# Altium PCB FU6561N-XCQ-DEMO_V1.0-20251116.pcbdoc
Units mm, origin at the board's own origin, x right, y up, seen from the top; angles counter-clockwise.
Board outline 57.6 x 57.58 mm, 2 copper layers (Top Layer, Bottom Layer); 115 components, 47 nets, 275 pads, 313 vias.
Unrouted connection lines stored in the file: 15.
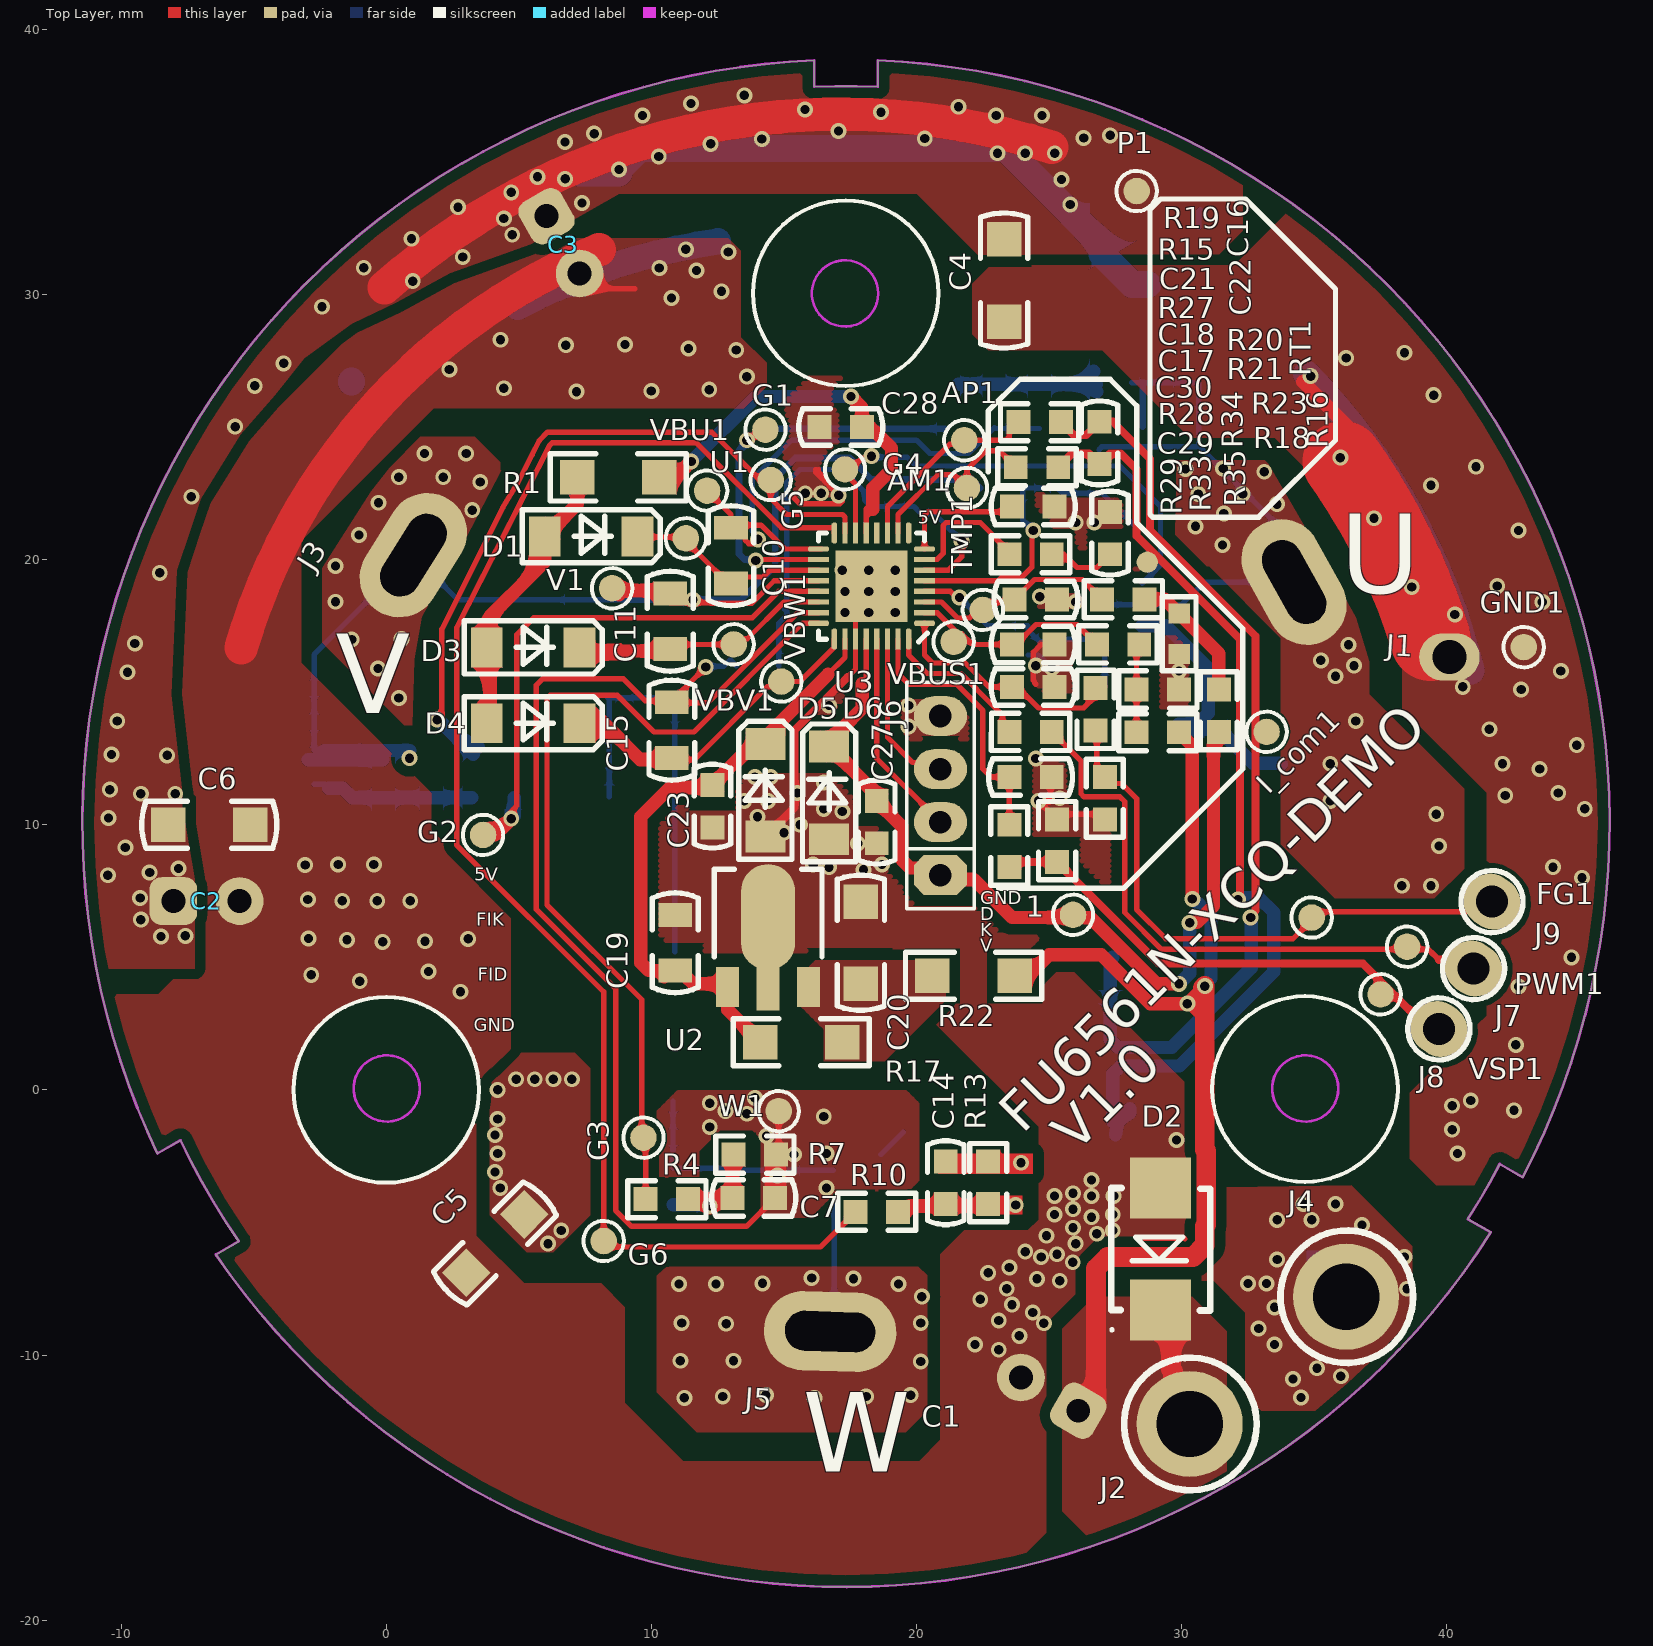
[diagram p0: Top Layer view]
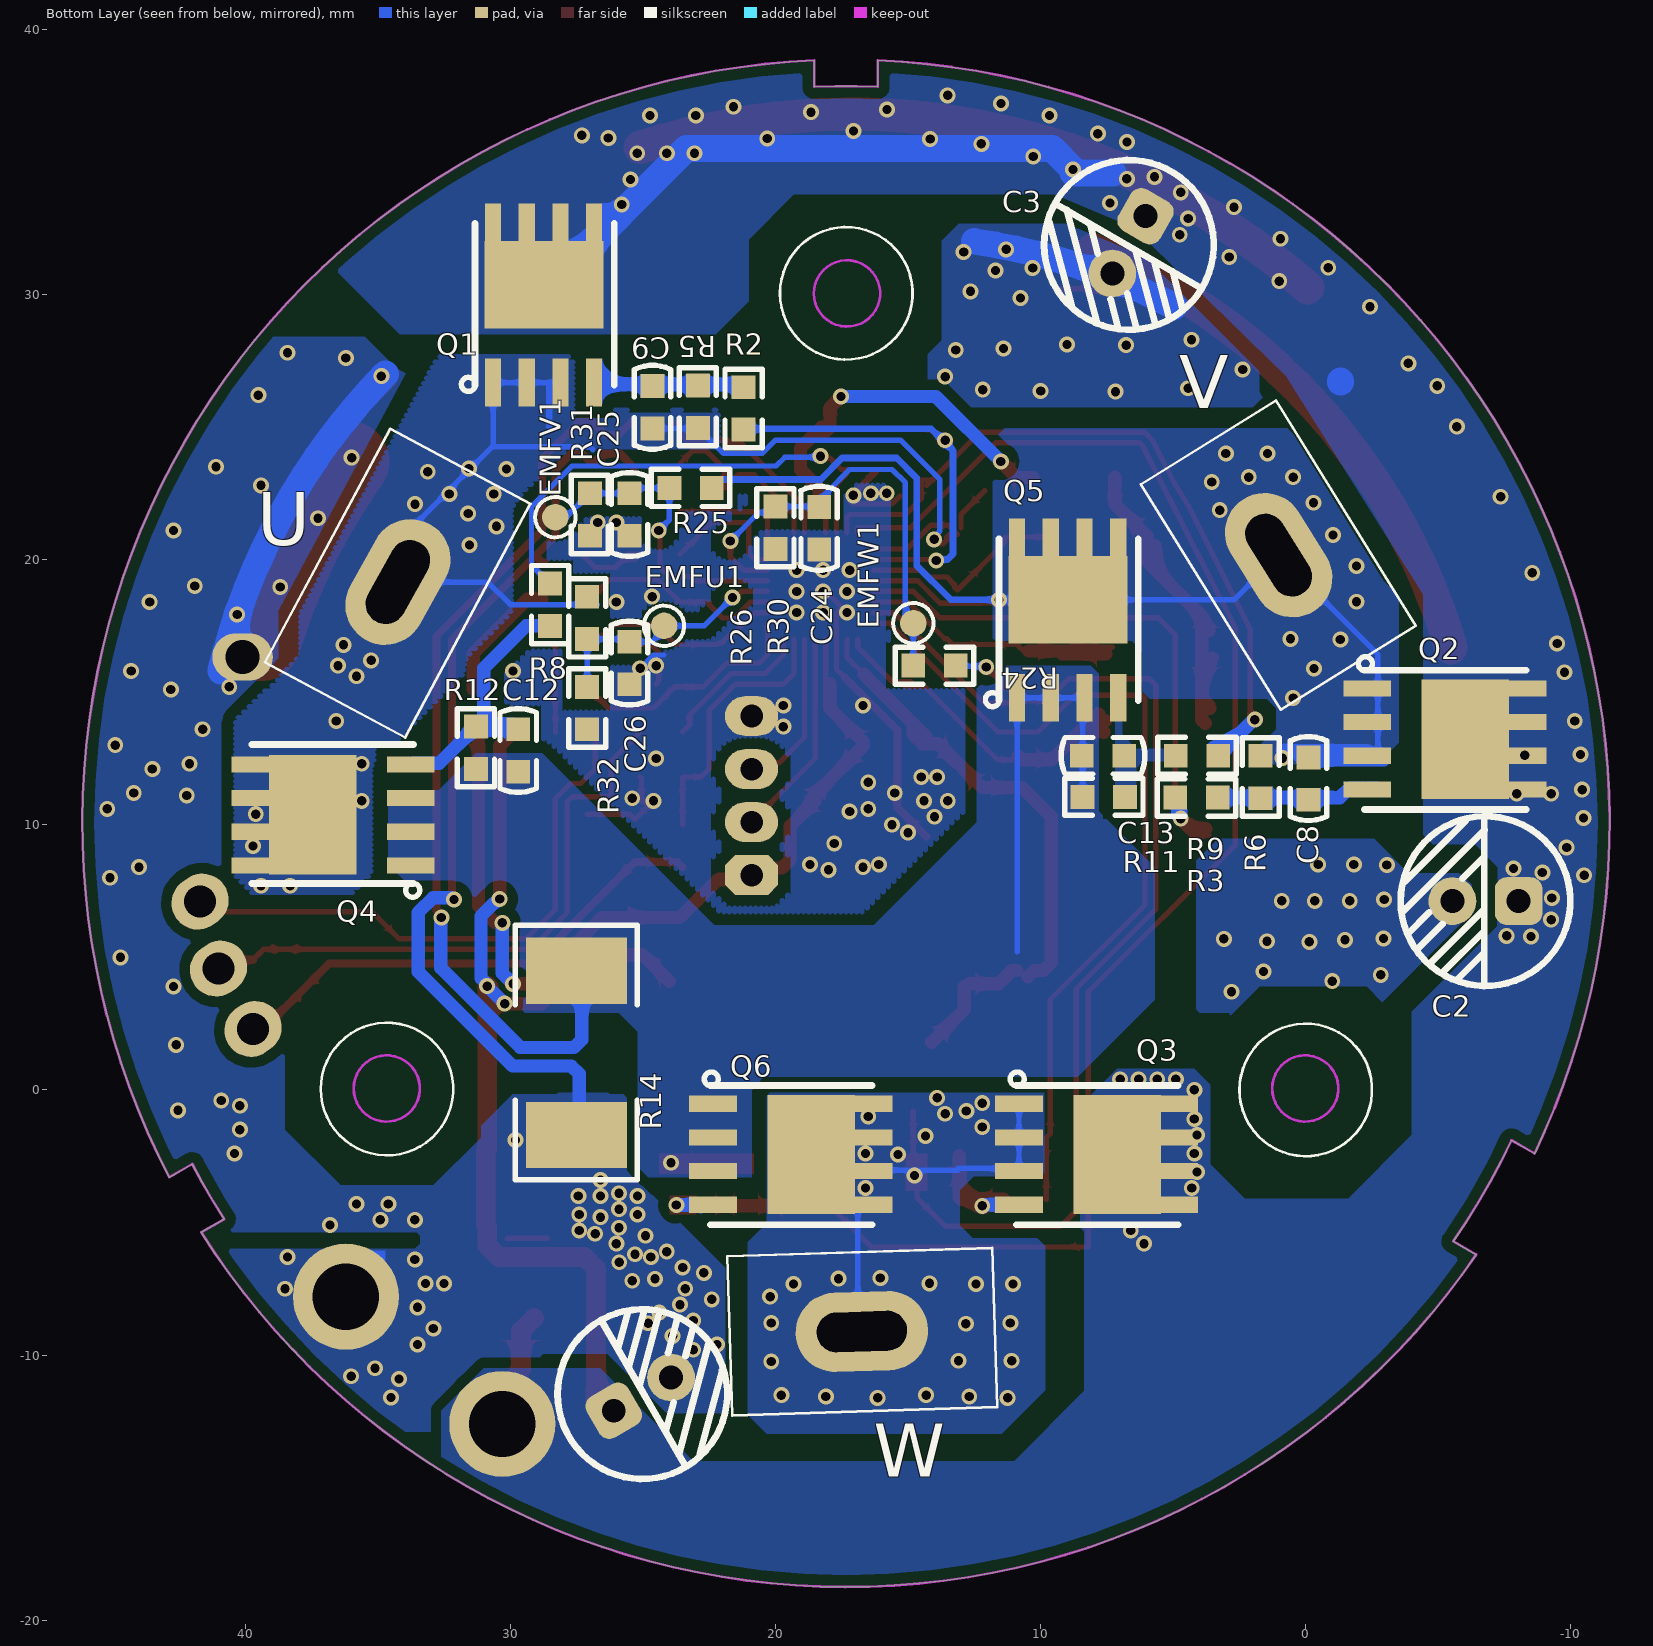
[diagram p1: Bottom Layer view, seen from below]

## Layer stack, top to bottom
Top Layer: signal copper 0.0356
Dielectric: dielectric 0.32, FR-4, Dk 4.8
Bottom Layer: signal copper 0.0356

## Board outline
-6.43,-6.211 -5.562,-5.71 cw(c17.338,10.052) -7.762,-1.899 -8.63,-2.401 cw(c17.338,10.052) 16.138,38.827 16.138,37.826 cw(c17.338,10.052) 18.538,37.826 18.538,38.827 cw(c17.338,10.052) 42.858,-3.296 41.991,-2.796 cw(c17.339,10.051) 40.791,-4.874 41.658,-5.375 cw(c17.338,10.052)

## Design rules (kind name [scope] priority, off if disabled: settings)
Clearance Clearance_1 [All vs InPolygon] p1: gap=0.4
Clearance [All] p2: gap=0.2
ComponentClearance [All] p1 off: gap=0.254 collisioncheckmode=3 verticalgap=0.254 showdistances=FALSE
Height [All] p1 off: minheight=0 maxheight=25.4 prefheight=12.7
HoleSize [All] p1 off: absolutevalues=TRUE maxlimit=2.54 minlimit=0.025 maxpercent=80.000 minpercent=20.000
HoleToHoleClearance [All] p1: gap=0.178 allowstackedmicrovias=TRUE
MinimumSolderMaskSliver [All] p1 off: minsoldermaskwidth=0.102
NetAntennae [All] p1 off: netantennaetolerance=0.025
PolygonConnect [All] p1: connectstyle=Direct reliefconductorwidth=0.254 reliefentries=4 polygonreliefangle="90 Angle"
RoutingVias [All] p1: holewidth=0.3 width=0.6 viastyle="Through Hole" minholewidth=0.2 minwidth=0.5 maxholewidth=0.711 maxwidth=1.27
SilkToSilkClearance [All] p1: silktosilkclearance=0
SilkscreenOverComponentPads [IsPad] p1: minsilkscreentomaskgap=0
SolderMaskExpansion [All] p1: expansion=0.102
Width [All] p1: maxlimit=7.62 minlimit=0.178 preferedwidth=0.2
20 further rules are at their usual default settings.

## Components (designator, comment, footprint, x,y, rotation, side; value= is the part's Value field where it differs from the comment)
1 "" TPM 25.9,6.6 r270 top
AM1 "" TPM 21.9,22.7 r180 top
AP1 "" TPM 21.8,24.5 r180 top
C1 "180uF/35V" CAP2_5 25.068,-11.526 r0 top
C2 "180uF/35V" CAP2_5 -6.851,7.138 r210 top locked
C3 "180uF/35V" CAP2_5 6.649,31.938 r150 top locked
C4 "CT106/50V" c1206 23.3,29 r90 top
C5 "CT106/50V" c1206 3.026,-6.874 r45 top
C6 "CT106/50V" c1206 -5.15,9.996 r180 top
C7 "1nf/50V" c0603 14.619,-4.072 r180 top
C8 "1nf/50V" C0603 -0.1,12.5 r270 bottom
C9 "1nf/50V" C0603 24.637,24.984 r90 bottom
C10 "CT106/25V" c0805 13,21.166 r270 top
C11 "CT106/25V" c0805 10.712,18.692 r270 top
C12 "1nf/50V" c0603 29.699,12.04 r90 bottom
C13 "1nf/50V" C0603 8.405,12.6 r180 bottom
C14 "1nf/50V" C0603 21.099,-2.74 r270 top
C15 "CT106/25V" c0805 10.771,14.585 r270 top
C16 "101/16V" c0603 26.901,23.64 r90 top
C17 "1uf/25V" c0603 23.64,16.799 r0 top
C18 "104/16V" c0603 25.26,18.501 r180 top
C19 "106/25V" C0805 10.9,6.566 r270 top
C20 "105/50V" c1206 17.9,4.026 r90 top
C21 "1uF/25V" C0603 25.16,22.001 r180 top
C22 "1uF/25V" c0603 27.299,21.76 r270 top
C23 "10uF/25V" c0603 12.299,11.46 r270 top
C24 "101/16V" c0603 18.35,21.941 r270 bottom
C25 "101/16V" c0603 25.501,22.46 r270 bottom
C26 "101/16V" c0603 25.499,15.34 r90 bottom
C27 "1uF/25V" C0603 18.499,10.86 r270 top
C28 "10uF/25V" C0603 17.9,25 r180 top
C29 "101/16V" c0603 25.06,11.801 r180 top
C30 "104/16V" c0603 25.16,15.201 r180 top
D1 "LL4148" SOD-123#1 5.952,20.875 r0 top
D2 "TVS_43V" "DO214AA, SMB" 29.2,-6 r90 top
D3 "LL4148" SOD-123#1 3.762,16.686 r0 top
D4 "LL4148" SOD-123#1 3.763,13.829 r0 top
D5 "SMF24CA" SOD-123#2 14.3,11.3 r90 top
D6 "BZT52C5V6" SOD-123#2 16.7,11.2 r90 top
EMFU1 "" TPM 24.2,17.5 r0 bottom
EMFV1 "" TPM 28.3,21.6 r0 bottom
EMFW1 "" TPM 14.8,17.6 r0 bottom
FG1 "" TPM 38.5,5.4 r0 top
G1 "" TPM 14.3,24.9 r0 top
G2 "" TPM 3.649,9.614 r0 top
G3 "" TPM 9.7,-1.8 r0 top
G4 "" TPM 17.3,23.4 r0 top
G5 "" TPM 14.5,23 r0 top
G6 "" TPM 8.2,-5.7 r0 top
GND1 "" TPM 42.9,16.7 r90 top
I_com1 "" TPM 33.2,13.5 r90 top
J1 "U" AD#1 34.238,19.152 r87 top locked
J2 "BAT+" DY 30.3,-12.6 r0 top
J3 "V" AD#2 1.023,20.167 r58 top
J4 "BAT-" DY 36.2,-7.8 r0 top
J5 "W" AD#3 16.738,-9.114 r356 top
J6 "JTAG" SIP4-2 20.9,11.1 r90 top locked
J7 "FG" tp 41.003,4.575 r0 top
J8 "PWM" tp 39.7,2.3 r0 top
J9 "VSP" tp 41.7,7.1 r0 top
P1 "" TPM 28.3,33.9 r0 top
PWM1 "" TPM 37.5,3.6 r90 top
Q1 "MXP4004SG" PQFQ5X6 28.81,30.327 r90 bottom
Q2 "MXP4004SG" PQFQ5X6 -5.972,13.302 r180 bottom
Q3 "MXP4004SG" PQFQ5X6 7.163,-2.36 r180 bottom
Q4 "MXP4004SG" PQFQ5X6 37.4,10.3 r0 bottom
Q5 "MXP4004SG" PQFQ5X6 9.046,18.436 r90 bottom
Q6 "MXP4004SG" PQFQ5X6 18.701,-2.36 r180 bottom locked
R1 "10-1%" r1206 7.2,23.1 r0 top
R2 "68R-1%" r0603#1 21.19,24.895 r90 bottom
R3 "68R-1%" r0603#1 4.925,11.016 r180 bottom
R4 "68R-1%" r0603#1 9.776,-4.131 r0 top
R5 "10K-1%" r0603#1 22.916,24.96 r90 bottom
R6 "10K-1%" r0603#1 1.71,12.605 r270 bottom
R7 "10K-1%" r0603#1 14.707,-2.428 r180 top
R8 "68R-1%" r0603#1 28.51,19.105 r270 bottom
R9 "68R-1%" r0603#1 3.295,12.61 r0 bottom
R10 "68R-1%" r0603#1 17.695,-4.61 r0 top
R11 "10K-1%" r0603#1 8.419,11.041 r180 bottom
R12 "10K-1%" r0603#1 31.286,12.099 r90 bottom
R13 "10K-1%" r0603#1 22.69,-2.695 r270 top
R14 "1mR/3W-1%" r2512 27.5,-1.7 r90 bottom
R15 "1K-1%" r0603#1 23.736,23.473 r0 top
R16 "10K-1%" r0603#1 31.41,13.495 r90 top
R17 "NC/0R 1%" R1206 14.1,1.8 r0 top
R18 "30K-1%" r0603#1 29.9,13.5 r180 top
R19 "1K-1%" r0603#1 23.836,25.173 r0 top
R20 "1K-1%" r0603#1 28.605,18.51 r180 top
R21 "1K-1%" r0603#1 28.405,16.81 r180 top
R22 "22R 1%" R1206 23.7,4.3 r180 top
R23 "5.1K-1%" r0603#1 28.295,15.09 r0 top
R24 "18K-1%" r0603#1 13.195,16.01 r0 bottom
R25 "18K-1%" r0603#1 22.395,22.71 r0 bottom
R26 "18K-1%" r0603#1 27.11,18.605 r270 bottom
R27 "33R" r0603#1 23.495,20.19 r0 top
R28 "1K-1%" r0603#1 25.105,13.51 r180 top
R29 "1K-1%" r0603#1 23.51,8.395 r90 top
R30 "3K-1%" r0603#1 19.99,20.395 r90 bottom
R31 "3K-1%" r0603#1 26.99,20.895 r90 bottom
R32 "3K-1%" r0603#1 27.11,15.205 r270 bottom
R33 "10K-1%" r0603#1 25.29,10.205 r270 top
R34 "1K-1%" r0603#1 26.76,13.545 r90 top
R35 "10K-1%" r0603#1 27.11,10.195 r90 top
RT1 "47K-1%" r0603#2 29.9,17.2 r270 top
TMP1 "" TPM 22.5,18.1 r270 top
U1 "" TPM 12.1,22.6 r0 top
U2 "78L15" SOT-89 12.876,3.885 r0 top
U3 "FU6561N" QFN32-0.4-4X4 18.301,19 r180 top
V1 "" TPM 8.519,18.917 r0 top
VBU1 "" TPM 11.3,20.8 r270 top
VBUS1 "" TPM 21.4,16.9 r270 top
VBV1 "" TPM 13.1,16.8 r270 top
VBW1 "" TPM 14.9,15.4 r270 top
VSP1 "" TPM 34.9,6.5 r90 top
W1 "" TPM 14.8,-0.8 r0 top

## Footprints (in the part's own frame and the unit in brackets; to place one, negate y for a bottom-side part, rotate by r counter-clockwise, add the part's x,y. Pads: shape width x height; smd on the part's side, far side on the other; paste and mask are expansions set on the pad)
AD#1 [mm]
  oval 5x3 hole 1.5 slot 3.4 at 32 deg rot 32: 1(0,0)
AD#2 [mm]
  oval 5x3 hole 1.5 slot 3.4 at 0 deg: 1(0,0)
AD#3 [mm]
  oval 5x3 hole 1.5 slot 3.4 at 2 deg rot 2: 1(0,0)
c0603 [mm]
  rect 0.9x0.9 smd: 1(-0.04,0.001) 2(1.56,0.001)
  silkscreen extent -0.82,-0.69 2.34,0.69
C0603 [mm]
  rect 0.9x0.9 smd: 1(-0.04,0.001) 2(1.56,0.001)
  silkscreen extent -0.82,-0.69 2.34,0.69
c0805 [mm]
  rect 0.9x1.27 smd: 1(-0.034,0) 2(2.066,0)
  silkscreen extent -0.87,-0.86 2.9,0.86
C0805 [mm]
  rect 0.9x1.27 smd: 1(-0.034,0) 2(2.066,0)
  silkscreen extent -0.87,-0.86 2.9,0.86
c1206 [mm]
  rect 1.3x1.3 smd: 1(-0.026,0) 2(3.074,0)
  silkscreen extent -1.02,-0.89 4.07,0.89
CAP2_5 [mm]
  rrect50% 1.8x1.8 hole 0.9 rot 150: 1(1.032,-0.574)
  round 1.8 hole 0.9: 2(-1.133,0.676)
  body extent -3.28,-3.14 3.12,3.25, height 14
"DO214AA, SMB" [mm]
  rect 2.3x2.3 smd: 1(-2.3,0) 2(2.3,0)
  silkscreen extent -3.1,-1.87 2.3,1.88, body extent -2.64,-1.87 2.57,1.96, height 2.6
DY [mm]
  round 4 hole 2.5: 1(0,0)
  silkscreen extent -2.47,-2.5 2.52,2.5
PQFQ5X6 [mm]
  rect 1.8x0.61 smd: 1(-3.651,1.837) 2(-3.651,0.567) 3(-3.651,-0.703) 4(-3.651,-1.973) 5(2.207,-1.973) 6(2.207,-0.703) 7(2.207,0.567) 8(2.207,1.837)
  rect 3.3x4.5 smd: 5(0.047,-0.079)
  silkscreen extent -3.98,-2.73 2.35,3.03, body extent -4.04,-2.72 2.59,2.49, height 1
QFN32-0.4-4X4 [mm]
  oct 0.8x0.2 smd: 1(-2,1.4) 8(-2,-1.4) 17(2,-1.4) 24(2,1.4)
  rect 0.8x0.2 smd: 2(-2,1) 3(-2,0.6) 4(-2,0.2) 5(-2,-0.2) 6(-2,-0.6) 7(-2,-1) 18(2,-1) 19(2,-0.6) 20(2,-0.2) 21(2,0.2) 22(2,0.6) 23(2,1)
  oct 0.2x0.8 smd: 9(-1.399,-2) 16(1.401,-2) 25(1.401,2) 32(-1.399,2)
  rect 0.2x0.8 smd: 10(-0.999,-2) 11(-0.599,-2) 12(-0.199,-2) 13(0.201,-2) 14(0.601,-2) 15(1.001,-2) 26(1.001,2) 27(0.601,2) 28(0.201,2) 29(-0.199,2) 30(-0.599,2) 31(-0.999,2)
  rect 2.7x2.7 smd: 27(0.001,0)
  silkscreen extent -2.1,-2 2,2.1, body extent -2.03,-2.16 2.16,2.16, height 1
r0603#1 [mm]
  rect 0.9x0.9 smd: 1(0.005,0.01) 2(1.605,0.01)
  silkscreen extent -0.67,-0.69 2.28,0.71
r0603#2 [mm]
  rect 0.762x0.813 smd: 1(-0.762,0) 2(0.762,0)
  silkscreen extent -1.4,-0.64 1.4,0.64, body extent -0.76,-0.41 0.84,0.39, height 0.45
r1206 [mm]
  rect 1.3x1.3 smd: 1(0,0) 2(3.1,0)
  silkscreen extent -1.02,-0.89 4.12,0.89
R1206 [mm]
  rect 1.3x1.3 smd: 1(0,0) 2(3.1,0)
  silkscreen extent -1.02,-0.89 4.12,0.89
r2512 [mm]
  rect 2.5x3.8 smd: 1(0,0) 2(6.196,0)
  silkscreen extent -1.69,-2.29 7.91,2.31
SIP4-2 [mm]
  oct 1.5x2 hole 0.85: 1(-3,0)
  oval 1.5x2 hole 0.85: 2(-1,0) 3(1,0) 4(3,0)
  silkscreen extent -4.27,-1.27 4.27,1.27
SOD-123#1 [mm]
  rect 1.2x1.5 smd: 1(0.028,0) 2(3.528,0)
  silkscreen extent -0.82,-1 4.38,1
SOD-123#2 [mm]
  rect 1.2x1.5 smd: 1(-1.75,0) 2(1.75,0)
  silkscreen extent -2.6,-1 2.6,1, body extent -1.85,-0.84 1.85,0.76, height 1.2
SOT-89 [mm]
  rect 0.864x1.5 smd: 1(0,0) 3(3.048,0)
  rect 0.864x2 smd: 2(1.524,0.115)
  oval 2.032x4 smd: 2(1.524,2.63)
  silkscreen extent -0.51,1.13 3.56,4.43
tp [mm]
  oval 2x2.2 hole 1.2 rot 55: 1(0,0)
  silkscreen extent -1.17,-1.17 1.17,1.17
TPM [mm]
  round 1 smd: 1(0,0)
  silkscreen extent -0.76,-0.76 0.76,0.76

## Part data
1 AM1 AP1 EMFU1 EMFV1 EMFW1 FG1 G1 G2 G3 G4 G5 G6 GND1 I_com1 P1 PWM1 TMP1 U1 V1 VBU1 VBUS1 VBV1 VBW1 VSP1 W1: library part Component_1
C1 C2 C3: library part CAPACITOR, "Capacitor"
C4 C5 C6 C7 C8 C9 C12 C13 C14: library part Cap, "YG-C1206K106-50V（10UF）-10%"
C10 C11 C15: library part CAP-CC(SMD), "Capacitor"
C16 C17 C20 C21 C22 C23 C24 C25 C26 C27 C28 C29 C30: library part CAP, "Capacitor"
C18: library part "CAP NP"
C19: library part "Cap Semi", "Capacitor (Semiconductor SIM Model)"
D1 D3 D4: library part DIODE, "Diode"
D2: library part D1206
D5 D6: library part TVS1, "Zener Diode"
J1 J2 J3 J4 J5: library part ANTENNA, "Generic Antenna"
J6: library part CON4, "Connector"
J7 J8 J9: library part CON1, "Connector"
Q1 Q2 Q3 Q4 Q5 Q6: library part MOSFET-N
R1 R15 R19 R24 R25 R26 R27 R30 R31 R32: library part RES(SMD)
R2 R3 R4 R8 R9 R10 R20 R21 R28 R29 R33 R34 R35: library part "Res Semi", "Semiconductor Resistor"
R5 R6 R7 R11 R12 R13: library part "Res Semi", "YG-R0603F2002(20KΩ)-1%"
R14: library part R-RES/2
R16: library part RES3
R17 R22: library part res1, "R0603F1001(1KΩ)-1%"
R18 R23: library part res1, "Resistor"
RT1: library part "Res Thermal", "Thermistor"
U2: library part VOLTREG, "78M12"

## Free pads (board coordinates)
  oval 2.286x1.778 hole 1.27: 0(40.097,16.326)
  round 0.8 smd: 1(28.7,19.9)

## Via types
v1: diameter 0.6, hole 0.35, Top Layer to Bottom Layer, tented both sides, 313 vias

## Nets (pads, with @x,y where several pads share a name; then routed paths per layer and width w, separated by ;. In a path a pad name is that pad's centre, name@x,y a point inside that pad or via, vN(x,y) a via of type N, cw(c..) or ccw(c..) an arc to the next point about the centre after c; other vN are vias at no path point)
+12V: C28.1 R1.2 U3.13 | length 16.6
  Top Layer w0.2: U3.13 18.1,21.6 ; 18.35,21.9 18.1,21.9 ; 18.4,21.9 18.1,21.6 ; 18.4,22.3 18.4,22.2 18.35,22.15 18.1,21.9 ; 18.1,21.6 18.1,21.9
  Top Layer w0.5: R1.2 10.9,23.1 v1(11.5,23.7) ; v1(17.527,26.15) 17.94,25.736 C28.1 ; 18.35,21.9 18.35,22.15 18.35,22.689 19.05,23.389 19.05,24.211 18.461,24.799 ; C28.1 18.14,24.799 18.461,24.799 ; C28.1 18.261,24.999 18.461,24.799
  Bottom Layer w0.5: v1(11.5,23.7) 13.95,26.15 v1(17.527,26.15)
AMP0M: AM1.1 R15.1 U3.10 | length 7.2
  Top Layer w0.2: U3.10 19.3,21.7 20.8,23.2 21.4,23.2 AM1.1 21.9,23.4 22.6,24.1 23.124,24.1 R15.1
AMP0O: U3.9
AMP0P: AP1.1 R19.1 U3.11 | length 7.4
  Top Layer w0.2: U3.11 18.9,22 21.247,24.347 21.647,24.347 AP1.1 23.374,24.5 23.491,24.617 23.491,24.833 R19.1
EMFU: C26.2 EMFU1.1 R26.2 R32.1 U3.4 | length 9.5
  Top Layer w0.2: U3.4 21.281,18.8 21.51,18.571 v1(21.618,18.571)
  Bottom Layer w0.2: v1(21.618,18.571) 22.689,17.5 EMFU1.1 24.2,17.347 24.647,16.9 C26.2 25.6,17 R26.2 R32.1
EMFV: C25.1 EMFV1.1 R25.2 R31.2 U3.5 | length 12.3
  Top Layer w0.2: U3.5 23.076,19.2 23.234,19.359 23.993,19.359 24.35,19.716 24.35,21.05 v1(24.4,21.1)
  Bottom Layer w0.2: v1@24.323,21.023 v1(24.4,21.1) ; v1@24.477,21.177 v1(24.4,21.1) ; C25.1 25.3,22.7 R25.2 24,21.5 v1(24.4,21.1) ; C25.1@25.6,22.5 R31.2 EMFV1.1@28.2,21.3
EMFW: C24.1 EMFW1.1 R24.2 R30.2 U3.6 | length 18.1
  Top Layer w0.2: U3.6 21.2,19.6 21.7,20.1 v1(21.7,20.7)
  Bottom Layer w0.2: R24.2 EMFW1.1 15.1,17.9 15.1,22.9 15.6,23.4 17.2,23.4 18.042,22.558 ; C24.1 18.349,22.251 18.042,22.558 ; v1(21.7,20.7) 20.633,21.767 20.133,21.767 19.9,22 18.409,22 18.349,21.94 18.042,22.247 18.042,22.558
FG: R28.2 U3.32 | length 5.8
  Top Layer w0.2: U3.32 19.7,16.4 20.4,15.7 21.669,15.7 22.9,14.469 23.236,14.133 23.236,13.764 R28.2
FICED: J6.3 U3.30 | length 6.2
  Top Layer w0.2: U3.30 18.9,13.3 19.851,12.349 20.651,12.349 J6.3
FICEK: J6.2 U3.29 | length 7.9
  Top Layer w0.2: U3.29 18.5,16.641 18.5,15.553 18.5,14.172 18.5,12.5 J6.2
GND: C1.2 C2.2 C3.2 C4.1 C5.1 C6.1 C16.1 C17.2 C18.1 C19.1 C20.2 C21.1 C22.1 C23.2 C24.2 C25.2 C26.1 C27.2 C28.2 C29.1 C30.1 D2.2 D5.1 D6.1 GND1.1 J4.1 J6.4 pad.0 pad.1 R14.1 R15.2 R23.2 R30.1 R31.1 R32.2 R33.1 R35.1 RT1.2 U2.2 U3.27 | length 119.5
  Top Layer w0.2: 15.3,22.4 15.6,22.1 17.1,22.1 17.2,22.2 17.2,22.285 v1(17.061,22.424) ; 16.2,23.3 16.2,23.285 16.3,23.185 ; 16.2,23.4 16.3,23.3 ; 16.3,23.4 16.3,23.3 ; 16.584,22.984 17.061,22.507 v1(17.061,22.424) ; v1(17.3,18) 17.45,18.15 U3.27@17.55,18.15 ; 17.4,15.565 17.7,15.865 17.7,17 17.7,18 U3.27@17.55,18.15 ; U3.27@18.3,19 17.55,18.25 U3.27@17.55,18.15 ; 24.5,15.3 24.45,15.35 24.45,15.396 24.4,15.445 24.4,16.5 24.7,16.8 C17.2 ; v1@24.7,10.8 24.753,10.853 25.01,10.853 25.049,10.892 25.049,11.749 C29.1 ; v1(25.4,11) 25.323,10.923 25.072,10.923 25.049,10.9 v1(24.6,10.9) R33.1 25.5,10.4 R35.1@27.1,10.4 ; 28.6,-5.6 30.1,-5.6 30.125,-5.625 ; 16.3,23.185 16.5,22.985 ; 16.3,23.185 16.3,23.3 ; 16.3,23.3 16.5,23.1 16.5,22.985 ; 16.5,22.985 v1(17.061,22.424)
  Top Layer w0.203: C3.2@6.631,30.619 7.035,30.215 9.382,30.215
  Top Layer w0.3: D5.1 15.4,10.65 15.4,12.8 15.4,13.565 17.4,15.565 ; R15.2 25.859,24 26.5,24 C16.1 27.3,24 27.7,24 28.3,23.4 28.3,20.893 29.046,20.146 ; pad.1 28.8,19.9 29.046,20.146 ; v1(32.124,7.18) 32.182,7.237 32.182,7.413 32.2,7.431 32.2,16.993 29.046,20.146
  Top Layer w0.508: 34.56,26.714 36.388,24.886
  Top Layer w1.27: -5.474,16.673 cw(c16.913,10.122) 8.021,31.686
  Top Layer w3.048: v1@36.071,23.694 cw(c17.338,10.281) pad.0@39.395,16.94
  Bottom Layer w0.2: 24.2,16.4 24.6,16.4 v1(25.1,15.9) ; v1(24.5,16) 24.9,16 v1@25.1,15.8
  Bottom Layer w0.5: R14.1 R14.1@27.587,-1.196 ; v1(32.124,7.18) 32.151,7.18 32.221,7.25 32.911,7.25 33.467,6.693 33.467,4.456 29.911,0.9 27.693,0.9 27.4,0.607 27.4,-1.196 R14.1@27.587,-1.196 ; R14.1@27.587,-1.196 27.716,-1.104 28.05,-0.869 28.05,-0.7 R14.1@27.587,-1.196
  Bottom Layer w1: 4.963,29.542 cw(c15.858,8.918) 12.5,32
  Bottom Layer w1.016: v1@34.706,27.003 cw(c17.338,10.052) pad.0@40.919,15.791
  other v1: 34.5,-11.6 34.2,-10.9 36,-10.8 35.1,-10.5 23.1,-9.8 22.2,-9.6 33.5,-9.6 23.875,-9.277 32.9,-9 24.8,-8.8 23.1,-8.7 24.382,-8.395 33.5,-8.2 23.6,-8.1 22.4,-7.9 23.4,-7.5 38.5,-7.5 32.5,-7.3 33.2,-7.3 25.4,-7.2 24.54,-7.127 22.7,-6.9 23.5,-6.7 25.89,-6.5 33.6,-6.4 24.7,-6.3 38.4,-6.3 25.3,-6.2 24.1,-6.1 26,-5.8 24.9,-5.5 26.8,-5.425 27.4,-5.3 25.9,-5.2 36.8,-5.1 33.6,-4.9 34.9,-4.9 26.6,-4.8 25.2,-4.7 27.4,-4.7 25.9,-4.5 34.6,-4.3 35.8,-4.3 25.2,-4 26.6,-4 27.433,-4 25.9,-3.9 26.6,-3.4 40.4,-2.4 29.807,-1.893 40.2,-1.5 42.535,-0.771 40.2,-0.6 40.9,-0.4 42.6,1.7 2.8,3.7 42.7,3.9 -1,4.1 -2.829,4.337 1.59,4.464 44.7,5 -0.137,5.582 1.463,5.607 -1.483,5.658 3.089,5.696 -2.931,5.709 -1.661,7.131 -0.34,7.131 0.905,7.131 -2.956,7.182 45.1,8 18,8.3 16.7,8.4 44,8.4 -3.058,8.477 -1.813,8.503 -0.467,8.503 16.1,8.5 18.7,8.5 17.782,9.292 15,9.7 15.6,10 14,10.3 17.2,10.5 16.5,10.6 45.2,10.6 13.5,10.9 14.4,10.9 42.2,11.1 15.5,11.2 44.2,11.2 16.5,11.6 13.9,11.8 14.5,11.8 43.5,12.1 42.1,12.3 24.5,12.5 44.9,13 41.6,13.6 19.7,13.7 16.7,14.5 19.7,14.5 42.8,15.1 40.6,15.2 29.9,15.8 44.3,15.8 40.3,17.926 18.2,18 19.2,18 26,18.4 43.6,18.4 24.65,18.6 17.3,18.8 18.2,18.8 19.2,18.8 38.674,18.967 41.9,19 17.201,19.6 18.2,19.6 19.2,19.6 42.7,21.1 26,21.4 26.7,21.4 37.252,21.558 15.8,22.5 16.4,22.5 39.4,22.8 41.1,23.5 35.982,23.844 39.5,26.2 7.178,26.333 9.998,26.359 12.182,26.41 4.435,26.46 13.6,26.9 34.864,26.918 2.378,27.172 36.2,27.6 38.4,27.8 13.198,27.908 11.395,27.959 6.772,28.086 9.007,28.111 4.308,28.289 10.76,29.864 12.639,30.118 11.7,30.9 10.3,31 12.9,31.6 11.3,31.7
HOU: G1.1 R2.1 U3.18 | length 16.1
  Top Layer w0.2: v1(13.6,24.5) 13.708,24.5 14.108,24.9 G1.1 ; v1(13.934,19.966) 13.968,20 U3.18
  Bottom Layer w0.254: v1(13.934,19.966) 13.9,20 13.513,20 13.3,20.213 13.3,24.106 13.6,24.406 v1(13.6,24.5) 13.694,24.5 14.124,24.93 21.057,24.93 R2.1@21.087,24.9
HOV: G2.1 R3.1 U3.21 | length 22.2
  Top Layer w0.2: 13.8,17.8 14.8,18.8 U3.21
  Top Layer w0.203: G2.1 G2.1@4.098,9.614 ; v1@4.638,10.357 4.918,10.738 4.918,17.164 5.554,17.8 13.8,17.8
  Top Layer w0.508: G2.1@3.775,9.849 4.346,9.861 ; G2.1@4.098,9.614 4.346,9.861 ; v1(4.715,10.23) 4.346,9.861
  Bottom Layer w0.508: R3.1@4.791,10.712 v1(4.715,10.23) 4.819,10.335 R3.1@4.819,11.026
HOW: G3.1 R4.1 U3.24 | length 33
  Top Layer w0.2: R4.1 9.781,-1.8 9.634,-1.653 9.634,3.404 6.064,6.975 6.064,14.762 6.181,14.879 8.721,14.879 10.1,13.5 11.6,13.5 15.7,17.6 U3.24
I_SHUNT: C12.1 C13.1 C14.1 C16.2 I_com1.1 Q4.1 Q4.2 Q4.3 Q5.1 Q5.2 Q5.3 Q6.1 Q6.2 Q6.3 R11.1 R12.1 R13.1 R14.2 R19.2 | length 51.7
  Top Layer w0.3: R19.2 25.924,24.7 26.4,24.7 C16.2 27.4,25.2 28.8,23.8 28.8,21.1 32.774,17.126 32.774,6.755 32.6,6.581 v1(32.6,6.5)
  Top Layer w0.508: R13.1@23.128,-2.75 v1(23.942,-2.75)
  Bottom Layer w0.203: Q5.3 Q5.1 10.884,5.204 ; R11.1 Q5.3@8.414,14.716
  Bottom Layer w0.5: R14.2@27.4,5 27.3,4.9 27.3,1.893 27.593,1.6 29.621,1.6 32.62,4.598 32.62,5.7 ; v1(32.6,6.5) 32.619,6.481 32.619,5.701
LOU: G4.1 R8.1 U3.14 | length 18.6
  Top Layer w0.2: G4.1 17.3,23.244 17.7,22.844 U3.14 ; G4.1@17.377,23.4 17.516,23.4 17.94,23.823 18.223,23.823 v1(18.3,23.9)
  Bottom Layer w0.203: v1(18.3,23.9) 18.341,23.859 19.647,23.859 19.978,23.529 27.671,23.529 29.2,22 29.2,19.8 R8.1
LOV: G5.1 R9.1 U3.15 | length 28.7
  Top Layer w0.2: 11.767,24.803 12.287,24.803 G5.1@14.09,23 ; G5.1@14.295,22.795 14.106,22.985 G5.1@14.09,23 ; U3.15 17.3,21.6 17.2,21.7 15.097,21.7 14.997,21.8 14.5,22.297 G5.1 G5.1@14.09,23
  Top Layer w0.203: v1@2.098,13.964 2.098,17.367 4.395,21.96 4.939,22.864 5.499,23.956 5.769,24.485 6.088,24.803 11.767,24.803
  Bottom Layer w0.508: v1(1.921,13.964) 1.967,13.964 2.477,13.453 ; R9.1@3.28,12.65 2.477,13.453 ; R9.1@3.47,12.922 2.477,13.453
LOW: G6.1 R10.1 U3.16 | length 55.7
  Top Layer w0.2: U3.16@16.8,21.2 16.9,21.2 U3.16
  Top Layer w0.203: U3.16@16.8,21.2 14.9,21.2 11.7,24.4 6.255,24.4 6.173,24.318 6.158,24.289 2.657,17.438 2.657,9.243 8.2,3.7 8.2,-5.925 16.375,-5.925 17.352,-4.948 R10.1
NetC7_2: C7.2 Q3.4 R4.2 R7.2 | length 6.9
  Top Layer w0.203: R7.2@13.102,-2.479 R7.2
  Top Layer w0.508: C7.2@12.741,-4.197 12.208,-4.451 R4.2 12.385,-4.121 ; C7.2@13.011,-4.121 12.385,-4.121 ; 13.046,-3.588 12.716,-3.918 12.385,-4.121 ; C7.2 R7.2@13.06,-2.479
  Bottom Layer w0.508: Q3.4 v1@12.159,-4.332
  other v1: 12.201,-4.375
NetC8_2: C8.2 Q2.4 R3.2 R6.2 | length 5.9
  Bottom Layer w0.203: Q2.4@-2.722,11.529 Q2.4@-2.322,11.529
  Bottom Layer w0.508: Q2.4@-2.165,11.373 -1.635,11.373 -1.289,11.026 R3.2@3.219,11.026
NetC9_2: C9.2 Q1.4 R2.2 R5.2 | length 6.8
  Bottom Layer w0.508: R2.2@21.575,26.613 26.051,26.613 ; Q1.4@26.686,27.095 26.051,26.613 ; Q1.4@26.775,26.613 26.051,26.613 ; Q1.4@26.787,26.333 26.051,26.613
NetC12_2: C12.2 Q4.4 R8.2 R12.2 | length 11.8
  Bottom Layer w0.508: R8.2 29.4,17.5 31,15.9 31,14.2 30.7,13.9 ; Q4.4 33.698,12.323 32.677,12.323 R12.2 ; 30.7,13.9 30.896,13.704 R12.2 ; 30.7,13.9 30.606,13.806 30.596,13.796 29.896,13.796 C12.2 31.192,13.6 R12.2
NetC13_2: C13.2 Q5.4 R9.2 R11.2
NetC14_2: C14.2 Q6.4 R10.2 R13.2 | length 5.3
  Top Layer w0.2: v1@23.59,-4.344 v1(23.737,-4.344)
  Top Layer w0.203: R13.2@22.713,-4.385 R13.2@23.106,-4.385
  Top Layer w0.508: R10.2@19.739,-4.378 R13.2@23.099,-4.378
  Bottom Layer w0.203: Q6.4 Q6.4@22.821,-4.332
  Bottom Layer w0.508: Q6.4@22.821,-4.402 22.878,-4.344 v1(23.737,-4.344)
NetC20_1: C20.1 R17.2 R22.2 U2.3
NetC21_2: C21.2 U3.8 | length 4.6
  Top Layer w0.2: U3.8 20.301,21.683 20.418,21.8 C21.2@23.6,21.8
NetC22_2: C22.2 R27.2 | length 3.3
  Top Layer w0.203: C22.2 26.8,19.7 26.049,19.7 25.736,20.013 ; 25.736,20.013 25.287,20.013 R27.2 25.549,20.2 25.736,20.013
NetD1_1: D1.1 D3.1 D4.1 R1.1 | length 13.9
  Top Layer w0.508: D3.1@3.521,16.275 3.914,15.284 ; D4.1@3.622,14.395 3.914,14.827 ; D3.1@3.648,17.316 3.914,17.862 ; D4.1 3.914,13.952 3.914,14.827 ; D1.1@5.68,20.517 5.54,19.488 ; R1.1 7.2,22.096 D1.1 5.98,19.928 5.54,19.488 ; 3.914,14.827 3.914,15.284 ; 3.914,15.284 3.914,17.862 ; 3.914,17.862 5.54,19.488
NetFG1_1: FG1.1 J7.1 R28.1 | length 22
  Top Layer w0.2: R28.1 26.2,12.4 26.2,11.167 26.317,11.05 27.674,11.05 27.85,10.874 27.85,6.686 29.236,5.3 39.3,5.3 39.7,4.9 ; J7.1 J7.1@41.025,4.575
  Top Layer w0.3: 39.7,4.9 40.3,4.9 J7.1@40.361,4.839
NetJ8_1: J8.1 PWM1.1 R29.1 R33.2 | length 18.9
  Top Layer w0.3: R29.1 23.7,8.6 R33.2 29.13,4.77 36.83,4.77 39.3,2.3 J8.1
NetJ9_1: J9.1 R34.1 R35.2 VSP1.1 | length 21.4
  Top Layer w0.2: R34.1 26.8,13.5 26.8,12.1 27.343,11.557 27.733,11.557 28.3,10.99 28.3,6.802 29.402,5.7 34.2,5.7 35.218,6.718 39.6,6.718 40.692,6.718 J9.1@41.074,7.1
NetR16_2: R16.2 R20.1 RT1.1 | length 4.8
  Top Layer w0.5: R20.1@28.8,18.5 29.362,18.5 RT1.1 31.4,16.462 R16.2
NetR18_2: R18.2 R21.1 R23.1 | length 3.4
  Top Layer w0.2: R18.2 28.295,16.695 R21.1
NetR27_1: R27.1 U3.7 | length 5
  Top Layer w0.2: U3.7 20.775,20 21.001,20.226 21.001,21.283 21.118,21.4 22.4,21.4 R27.1@23.6,20.2
OVP: C17.1 R21.2 U3.2 VBUS1.1 | length 7.6
  Top Layer w0.2: U3.2 20.775,18 21.575,17.2 21.7,17.2 22.053,16.847 22.171,16.847 22.217,16.801 23.76,16.801 24.51,17.551 26.049,17.551 R21.2
P: C1.1 C2.1 C3.1 C4.2 C5.2 C6.2 D2.1 J2.1 P1.1 Q1.5 Q1.6 Q1.7 Q1.8 Q2.5 Q2.6 Q2.7 Q2.8 Q3.5 Q3.6 Q3.7 Q3.8 R18.1 R22.1 | length 95.9
  Top Layer w0.5: R22.1@24,4.1 25,5.1 26.962,5.1 28.812,3.25 v1(30.211,3.25) ; R18.1 30.4,12.985 v1(30.4,7.2) ; 30.8,2.8 30.35,3.25 v1(30.211,3.25) ; v1@30.8,3.839 v1(30.211,3.25)
  Top Layer w0.75: C1.1@26.765,-11.62 26.765,-6.739 27.204,-6.3 30.431,-6.3 30.87,-5.861 30.87,-5.143 30.925,-5.088 30.925,-2.312 30.87,-2.257 30.87,2.8 v1@30.87,3.91 ; D2.1@29.1,-8.6 29.6,-9.1 29.6,-10.536 29.678,-10.614 29.678,-12.922 J2.1@29.6,-13 ; v1@30.8,3.839 v1@30.87,3.91 ; v1(30.87,3.913) v1@30.87,3.91
  Top Layer w1.27: -0.067,30.262 cw(c17.145,10.87) v1@25.089,35.552
  Bottom Layer w0.2: Q1.8 30.648,33.148 Q1.8@30.7,33.2
  Bottom Layer w0.5: v1(30.211,3.25) 30.87,3.91 v1(30.87,3.913) ; v1(30.4,7.2) 30.427,7.2 30.577,7.05 30.611,7.05 31.1,6.561 31.1,4.21 v1@30.8,3.91
  Bottom Layer w1.016: -1.318,26.688 -1.318,26.739 ; 7.268,34.585 v1@8.779,34.585 ; v1(8.779,34.715) 9.563,35.5 20.31,35.5 23.364,35.5 23.817,35.047 26.989,31.876 26.989,31.516 28.131,30.374 Q1.5@28.731,30.374
  other v1: 6.1,-5.8 6.6,-5.3 4.3,-3.7 4.1,-3.1 4.2,-2.4 4.1,-1.7 4.2,-1.1 4.2,0 4.9,0.4 5.6,0.4 6.3,0.4 7,0.4 -8.493,5.785 -7.579,5.81 -9.255,6.42 -9.281,7.233 -10.5,8.096 -8.925,8.198 -7.833,8.35 -9.84,9.138 -10.475,10.255 -9.255,11.17 -7.96,11.17 -10.424,11.322 -8.265,12.617 -10.362,12.652 -10.144,13.913 -9.762,15.752 -9.484,16.834 -8.544,19.501 -7.35,22.371 -5.699,25.013 -4.962,26.552 -3.871,27.4 -2.423,29.534 1,30.5 -0.848,31.007 2.886,31.413 0.955,32.099 4.75,32.25 4.435,32.861 2.708,33.293 25.797,33.395 7.382,33.445 4.715,33.852 25.466,34.334 6.747,34.36 5.705,34.436 10.277,35.198 23.053,35.325 24.095,35.325 25.212,35.325 12.233,35.681 6.738,35.752 14.163,35.858 20.31,35.884 26.3,35.9 27.3,36 7.839,36.062 17.059,36.163 9.668,36.747 23.003,36.747 24.73,36.747 18.659,36.874 15.789,36.976 21.58,37.078 11.496,37.205 13.503,37.509
PWM: C29.2 R29.2 U3.31 | length 10.2
  Top Layer w0.2: U3.31 19.3,15.7 19.7,15.3 21.503,15.3 22.5,14.303 22.5,12.1 22.8,11.8 C29.2 R29.2
TMP: C18.2 R20.2 TMP1.1 U3.3 | length 8.6
  Top Layer w0.2: U3.3 20.941,18.4 21.541,17.8 22,17.8 TMP1.1@22.5,18.3 ; TMP1.1@22.5,18.4 23.6,18.4 C18.2 ; C18.2@23.7,18.4 C18.2 ; C18.2@24.05,18.85 24.45,19.25 26.25,19.25 R20.2 ; C18.2 24.1,18.9 C18.2
U: C9.1 C10.1 J1.1 Q1.1 Q1.2 Q1.3 Q4.5 Q4.6 Q4.7 Q4.8 R5.1 R26.1 U1.1 U3.17 | length 45.9
  Top Layer w0.2: U1.1 13,21.7 C10.1 ; v1(14.015,20.762) 14.015,20.706 13.909,20.6 13.675,20.6 13.535,20.74 13.535,20.85 13.433,20.952 13.138,20.952 13.486,21.3 14.132,21.3 15.032,20.4 U3.17@16.401,20.4
  Bottom Layer w0.203: v1(14.015,20.762) 14.015,20.865 13.8,21.08 13.8,23.014 15.288,24.502 19.998,24.502 20.5,24 21.96,24 R5.1 22.947,24.944 C9.1 ; R26.1@26.726,18.3 30,18.3 30.852,19.152 J1.1 34.238,20.686 30.648,24.276 Q1.1 Q1.2 Q1.3 ; 26.889,24.149 26.99,24.251 30.622,24.251
  Bottom Layer w0.254: 28.53,25.021 28.53,26.584
  other v1: 38.3,7.7 39.4,7.7 39.7,9.2 39.6,10.4 35.6,10.9 35.6,12.3 36.563,13.915 35.8,15.6 36.5,16 35.245,16.199 36.287,16.783 31.538,20.552 30.521,21.253 31.588,21.736 33.594,22.092 30.623,22.473 32.299,22.473 33.112,23.311 30.14,23.412 31.562,23.438
V: C8.1 C11.1 J3.1 Q2.1 Q2.2 Q2.3 Q5.5 Q5.6 Q5.7 Q5.8 R6.1 R25.1 U3.20 V1.1 | length 50.6
  Top Layer w0.2: C11.1@10.538,18.552 10.714,18.376 11.567,18.376 12.215,18.376 12.241,18.35 13.784,18.35 14.634,19.2 U3.20
  Top Layer w0.203: J3.1@1.023,20.023 J3.1 ; V1.1 V1.1@8.771,18.917
  Top Layer w0.508: V1.1@8.771,18.664 8.933,18.826 10.331,18.826 10.538,18.619 C11.1@10.538,18.552
  Bottom Layer w0.203: Q2.3@-2.322,12.799 -2.722,12.799 -2.722,16.422 J3.1 2.706,18.484 Q5.5@8.967,18.484
  Bottom Layer w0.254: Q5.5@8.967,18.484 v1(11.567,18.484) 13.384,18.484 14.673,19.773 14.673,22.825 14.673,23.077 15.423,23.827 15.675,23.827 17.486,23.827 18.29,23.023 22.077,23.023 R25.1
  Bottom Layer w0.508: Q2.3@-2.94,12.448 C8.1@-0.137,12.448 ; Q2.3@-2.322,12.799 v1@0.879,12.799
  other v1: 0.879,12.511 0.473,14.776 -0.315,15.894 -1.305,16.986 0.574,17.012 -1.915,18.409 -1.915,19.755 -1.026,20.923 3.241,21.863 -0.289,22.142 3.546,22.93 0.473,23.108 2.149,23.108 1.438,23.997 3.013,23.997
VBU: C10.2 D1.2 U3.19 VBU1.1 | length 8.1
  Top Layer w0.2: D1.2 9.503,20.852 11.338,20.852 11.338,20.652 13.138,18.852 13.243,18.956 13.243,19.047 13.535,19.34 14.209,19.34 14.469,19.6 14.9,19.6 U3.19
VBV: C11.2 D3.2 U3.22 VBV1.1 | length 12.8
  Top Layer w0.2: 9.181,16.441 9.192,16.452 C11.2@10.538,16.452 ; C11.2@10.438,16.552 C11.2@10.538,16.452 ; U3.22 15,18.4 13.616,17.016 13.532,17.016 13.316,16.8 10.886,16.8 C11.2@10.538,16.452
  Top Layer w0.203: D3.2 8.829,16.758
  Top Layer w0.508: D3.2@7.535,16.441 9.181,16.441 ; 8.938,16.552 C11.2@10.438,16.552
VBW: C15.2 D4.2 U3.25 VBW1.1 | length 13.1
  Top Layer w0.2: C15.2@10.838,12.586 C15.2@10.89,12.534 ; C15.2@10.89,12.452 11.618,12.452 14.366,15.2 VBW1.1@15.1,15.2 ; VBW1.1 15.6,15.4 16.9,16.7 U3.25
  Top Layer w0.508: D4.2@7.559,13.929 D4.2@7.813,13.929 ; D4.2@7.61,13.481 8.398,13.633 ; D4.2@7.813,14.167 8.102,13.929 8.398,13.633 ; C15.2@10.838,12.586 C15.2 10.704,12.452 9.579,12.452 8.398,13.633
VCC: C19.2 C23.1 D5.2 R17.1 U2.1 U3.26 | length 23.3
  Top Layer w0.2: 16.662,15.676 17.3,16.314 U3.26
  Top Layer w0.5: C19.2@10.481,4.266 10.246,4.5 9.893,4.5 9.6,4.793 9.6,10.3 10.7,11.4 12.2,11.4 C23.1 ; C19.2 11.085,4.5 11.285,4.3 11.285,4.293 11.578,4 12.694,4 U2.1@12.876,3.818 ; C23.1@12.433,11.633 13.85,13.05 D5.2 ; U2.1 U2.1@12.876,3.818 ; R17.1 12.876,3.024 U2.1@12.876,3.818 ; 16.662,15.676 14.8,13.814 14.8,13.8 ; D5.2 14.45,13.05 14.8,13.4 14.8,13.8 ; D5.2 14.3,13.3 14.8,13.8
VDD5: 1.1 C27.1 D6.2 J6.1 R16.1 U3.28 | length 32.9
  Top Layer w0.2: 17.95,15.325 18.1,15.475 U3.28
  Top Layer w0.5: 17.95,15.325 17.95,14.4 16.7,13.15 D6.2 18.6,11.05 C27.1@18.6,10.8 ; C27.1 C27.1@18.6,10.8 ; v1(29.9,4) 29.051,4 26.56,6.492 26.362,6.492 26.349,6.504 25.904,6.504 25.9,6.5 25.896,6.504 25.451,6.504 25.446,6.5 23.6,6.5 22.168,7.932 21.068,7.932 20.629,8.371 19.75,8.371 19.45,8.671 19.45,9.95 C27.1@18.6,10.8 ; v1(30.3,6.3) 30.319,6.319 30.58,6.319 31.2,6.939 31.2,13.3 R16.1
  Bottom Layer w0.5: v1(29.9,4) 30.3,4.4 v1(30.3,6.3)
VSP: C30.2 R34.2 U3.1 | length 9.2
  Top Layer w0.2: U3.1 20.301,16.399 20.6,16.1 21.834,16.1 22.734,15.2 23.8,15.2 24.6,14.4 26.3,14.4 R34.2@27.1,15.2
W: C7.1 C15.1 J5.1 Q3.1 Q3.2 Q3.3 Q6.5 Q6.6 Q6.7 Q6.8 R7.1 R24.1 U3.23 W1.1 | length 61.2
  Top Layer w0.2: C15.1@10.771,14.671 C15.1 10.79,14.6 12.134,14.6 15.534,18 U3.23 ; C15.1@10.771,14.671 v1(12.05,15.95) ; R7.1 14.8,-2.339 W1.1
  Top Layer w0.203: C15.1@10.771,14.671 9.773,14.671 8.944,15.5 5.9,15.5 5.662,15.262 5.662,6.808 8.65,3.82 8.65,-4.55 9.248,-5.148 13.584,-5.148 C7.1 14.66,-3.325 v1(14.753,-3.232) 14.702,-3.181 R7.1
  Bottom Layer w0.2: v1@12.1,15.9 12.174,15.974 12.724,15.974 12.95,16.2 13,16.2 R24.1 ; Q6.5@18.654,-2.439 Q6.5@19.5,-1.593
  Bottom Layer w0.203: Q3.1@10.814,-0.422 Q3.1 10.814,-2.962 13.114,-2.962 ; 13.114,-3.027 Q6.6@16.858,-3.027 ; J5.1@16.894,-8.958 Q6.5@16.894,-4.332
  other v1: 11.242,-11.614 16.145,-11.614 12.69,-11.563 18.1,-11.563 14.316,-11.513 19.777,-11.513 20.158,-10.243 11.09,-10.217 13.097,-10.217 12.817,-8.82 11.141,-8.795 20.158,-8.795 20.2,-7.8 11.039,-7.322 12.436,-7.322 19.32,-7.322 14.189,-7.296 17.618,-7.118 16.043,-7.093 16.6,-3.7 15.378,-2.437 16.6,-2.4 14.339,-1.737 12.2,-1.4 16.5,-1 13.6,-0.9 12.8,-0.8 12.2,-0.5 13.9,-0.3
pads on no net: U3.12

## Polygon pours and split planes (outlines as drawn)
GND on Top Layer "Bottom Layer-No Net" (solid, remove dead copper, pour order 45): 20.9,-8.6 20.9,-6.2 21.8,-5.3 24.2,-5.3 24.6,-4.9 24.6,-1.4 19.1,4.1 19.1,5.9 24.5,5.9 30.4,0 30.4,-3.7 36.4,-3.6 38.7,-5.9 38.7,-9.6 36.2,-12.1 33,-12.1 32.4,-11.5 32.4,-8.4 31.2,-7.2 26.5,-7.2 24.9,-8.8 24.9,-16.7 22.3,-19.3 -2.7,-19.3 -15.3,-6.7 -15.3,1 -12.7,3.6 -8.6,3.6 -7.7,4.5 -7.7,22.1 2.315,32.115 8.185,32.115 12.903,32.115 13.376,31.642 13.376,28.391 14.341,27.426 14.341,26.541 13.5,25.7 1.782,25.7 -3.2,20.718 -3.2,16.1 1.7,11.2 1.7,9.8 4.7,6.8 4.7,1.55 3.4,0.25 3.4,-5.5 5.2,-7.3 8.1,-7.3 9,-8.2 9,-11.8 11.2,-14 20.1,-14 20.9,-13.2
P on Top Layer "NONET_L01_P-001" (solid, remove dead copper, pour order 66): 25.5,-9 26.7,-7.8 30.4,-7.8 31.7,-9.1 31.7,-17.3 26.9,-17.3 25.5,-15.9
P on Top Layer "Bottom Layer-No Net" (solid, remove dead copper, pour order 44): 5.455,31.897 2.4,30.8 0.4,29.7 -1.3,28.9 -3.1,27.6 -4.2,26.2 -5.5,24.7 -7,22.3 -7.4,21.1 -7.9,19.6 -8.1,14.9 -7.687,11.2 -7.7,10.7 -7.223,7.937 -7.223,4.577 -11.668,4.577 -11.668,5.709 -12.151,6.191 -10.17,22.65 -2.55,34.36 10.658,38.957 10.938,35.02
P on Top Layer "NONET_L01_P-001" (solid, remove dead copper, pour order 64): 31.4,31.5 32.3,32.4 32.3,35.4 31.8,35.9 21.7,35.9 21.5,36.1 8.2,36.1 7.4,35.3 7.4,33.8 20,33.8 22.3,31.5
GND on Top Layer "Bottom Layer-No Net" (solid, remove dead copper, pour order 63): 27,27.9 30.3,24.6 33.5,24.6 38.1,20 38.1,16.265 38.319,16.046 38.319,14.381 41.5,11.2 41.5,2.8 38.6,-0.1 38.6,-2.6 39.6,-3.6 43.2,-3.6 47.8,1 47.8,23.6 41.8,29.6 38.1,33.3 34.186,33.3 31.986,31.1 22.8,31.1 22.1,30.4 22.1,28.5 22.7,27.9
V on Top Layer "Bottom Layer-No Net" (solid, remove dead copper, pour order 48): 0.684,13.752 0.977,13.751 1.057,16.25 1.336,17.85 2.987,20.771 4.334,23.362 4.308,23.387 4.308,23.666 3.343,24.632 1.032,24.632 -0.569,22.574 -2.397,19.704 -2.423,19.679 -2.423,16.859
W on Top Layer "Bottom Layer-No Net" (solid, remove dead copper, pour order 47): 20.061,-6.661 20.4,-7 20.4,-12.1 19.59,-12.91 11.71,-12.91 10.201,-11.401 10.201,-7.017 10.557,-6.661 10.557,-6.687 10.582,-6.661
P on Top Layer "Bottom Layer-No Net" (solid, remove dead copper, pour order 43): 23.307,32.988 23.695,32.6 28.9,32.6 29.5,33.2 29.5,38.126 28.9,38.779 11.293,38.779 9.515,37.001 9.515,35.528 21.656,35.528 23.307,33.877
NetC20_1 on Top Layer "NONET_L01_P-001" (hatched Horizontal grid 0.01 track 0.01, remove dead copper, pour order 42): 21.1,4.9 21.1,3.4 18.8,1.1 16.5,1.1 16.5,2.3 15.5,3.3 15.5,4.2 16.2,4.9
P on Top Layer "NONET_L01_P-001" (hatched Horizontal grid 0.01 track 0.01, remove dead copper, pour order 67): 3.9,-4.7 5.3,-6.1 6.3,-6.1 7.8,-4.6 7.8,-1.1 7.8,0.7 7.1,1.4 5.1,1.4 3.9,0.2
GND on Top Layer "NONET_L01_P-001" (hatched Horizontal grid 0.2 track 0.2, remove dead copper, pour order 68): 17.95,26.85 15.95,26.85 15.1,26 15.05,23.95 9.3,18.2 9.3,6.9 11.1,5.1 27.2,5.1 27.4,5.2 30.2,8 30.2,17.8 27.7,20.3 27.7,22.1 27.4,22.4 24.8,22.4 24.5,22.7 24.5,25.9 23.5,26.9 18,26.9
W on Top Layer "NONET_L01_P-001" (hatched Horizontal grid 0.01 track 0.01, remove dead copper, pour order 69): 10.2,-0.8 11,0 19.6,0 20.1,-0.5 20.1,-3.4 19.7,-3.8 17,-3.8 16,-4.8 14.312,-4.8 14.122,-4.61 14.122,-1.822 13.8,-1.5 12.6,-1.5 11.8,-2.3 11.8,-3.3 10.3,-3.3 10.2,-3.2
U on Top Layer "Bottom Layer-No Net" (solid, remove dead copper, pour order 46): 40.65,11.35 40.65,8.348 39.53,7.228 35.772,7.228 33.742,9.258 33.742,17.042 31.034,19.75 30,19.75 29.75,20 29.81,23.743 33.137,23.743 33.264,23.616 34.788,20.974 36.566,17.824 37.076,16.15 37.076,14.924
GND on Bottom Layer "Bottom Layer-No Net" (solid, remove dead copper, pour order 55): 13.728,32.022 13.728,28.272 14.249,27.751 14.249,25.749 1.997,25.749 1.623,26.123 ccw(c1.318,26.428) 1.75,26.428 1.75,27 cw(c1.999,27) 1.823,27.176 6.113,31.466 6.25,31.5 9.037,32.661 13.089,32.661
NetC13_2 on Bottom Layer "Bottom Layer-No Net" (solid, remove dead copper, pour order 57): 4.867,12.363 4.892,12.389 5.553,12.389 6.137,12.389 6.289,12.236 6.391,12.135 6.391,11.246 6.391,10.789 6.416,10.763 6.442,10.738 7.153,10.738 7.178,10.763 7.178,13.176 7.178,14.599 7.153,14.624 6.924,14.395 6.924,13.811 6.924,13.405 6.594,13.075 6.391,12.871 4.791,12.871
U on Bottom Layer "Bottom Layer-No Net" (hatched Horizontal grid 0.2 track 0.2, remove dead copper, pour order 35): 22.052,25.45 22.052,24.816 21.434,24.198 21.2,24.198 21.2,23.602 23.856,23.602 28.327,23.602 29.965,21.964 29.965,18.15 30.076,17.382 35.252,12.206 35.252,8.15 36.152,7.25 39.552,7.25 40.352,8.05 40.352,13.948 37.915,16.385 37.915,17.95 32.835,27.45 32.535,27.75 27.907,27.75 27.552,27.394 27.552,26.05 27.152,25.65 22.252,25.65
GND on Bottom Layer "Bottom Layer-No Net" (solid, remove dead copper, pour order 56): -2.892,3.308 -2.3,3.9 1.739,3.9 2.819,2.819 2.9,2.9 4,2.9 4.138,3.038 4.138,5.393 4.138,8.634 3.305,9.468 -2.575,9.468 -3.871,8.172 -5.776,8.172 -5.801,8.147 -6.258,7.741 -6.258,6.674
GND on Bottom Layer "Bottom Layer-No Net" (solid, remove dead copper, pour order 53): 29.9,-0.159 31.1,-1.359 31.1,-1.8 32.9,-3.6 36.4,-3.6 38.5,-1.5 38.5,1.927 39.335,2.762 40.808,8.122 40.907,8.221 40.907,13.893 38.751,16.049 38.751,18.002 38.776,18.028 33.95,27.019 34.28,27.197 35.483,28.4 43.7,28.4 46.682,25.418 46.682,5.282 46.9,5.065 46.9,0.3 41.225,-5.375 33.525,-5.375 33.4,-5.5 33.4,-5.8 33.6,-6 42.2,-6 43.75,-7.55 38.4,-12.9 31.7,-12.9 28.75,-9.95 26.35,-9.95 24.1,-12.2 21.9,-12.2 21.9,-6.7 24.6,-4 24.725,-3.925 25.6,-3.05 25.6,-0.3 25.741,-0.159
P on Bottom Layer "Bottom Layer-No Net" (solid, remove dead copper, pour order 52): 20.72,-14 23.1,-14 26.6,-10.5 31,-10.5 32.6,-12.1 32.6,-18.3 30.4,-18.3 30.15,-18.55 29,-19.7 -2.8,-19.7 -7.731,-14.769 -7.731,-5.391 -11.186,-1.937 -11.186,19.272 -9.128,21.33 -8.951,21.152 -5.014,21.152 -5.014,21.253 -4.429,20.669 -4.429,9.62 -4.785,9.265 -6.385,9.265 -7.249,8.401 -7.249,7.537 -7.223,7.512 -7.223,6.166 -4,2.942 -4,-1.7 -1.6,-4.1 2.3,-4.1 3.6,-2.8 3.6,0.2 4.2,0.8 7.1,0.8 8.5,-0.6 8.5,-5.2 8.35,-5.35 8.35,-11.35 11,-14
W on Bottom Layer "Bottom Layer-No Net" (solid, remove dead copper, pour order 51): 21.047,-5.747 21.047,-12.249 20.336,-12.96 11.46,-12.96 9.82,-11.32 9.82,-5.899 10.125,-5.594 12.563,-5.594 13.046,-5.112 13.046,-3.791 12.512,-3.258 10.023,-3.258 9.871,-3.105 9.871,-0.108 20.209,-0.108 20.336,-0.235 20.336,-5.036
V on Bottom Layer "Bottom Layer-No Net" (solid, remove dead copper, pour order 50): 10.912,16.935 11.268,16.935 11.7,16.935 11.776,17.012 11.801,17.037 11.801,17.596 11.801,24.505 11.623,24.682 11.344,24.962 10.684,24.962 0.701,24.962 0.473,24.733 -2.931,19.196 -3.5,18.627 -3.5,13.085 -3.058,12.643 -2.728,12.643 -1,12.643 -0.823,12.465 -0.645,12.287 0.524,12.287 1.87,12.287 1.895,12.313 1.895,12.821 1.565,13.151 1.108,13.608 1.108,14.294 1.108,14.395 1.438,14.726 1.463,14.751 2.048,14.751 5.883,14.751 6.137,15.005 6.162,15.03 6.162,15.361 6.162,16.529 6.315,16.681 6.569,16.935 7.407,16.935
I_SHUNT on Bottom Layer "Top Layer-No Net" (solid, remove dead copper, pour order 37): 28.8,12.7 31.3,12.7 32.7,11.3 34.2,11.3 34.6,10.9 34.6,8.5 34,7.9 32.45,7.9 32.1,7.55 32.1,4.7 30.3,2.9 25.9,2.9 25.2,2.2 25.2,-2.9 24.8,-3.3 20.9,-3.3 20.9,-0.013 20.444,0.5 8.6,0.5 5.7,3.4 5.7,8.4 7.8,10.5 7.8,15.7 8.1,16 12,16 12.4,15.6 12.4,10.1 16.3,6.2 22.3,6.2
GND on Bottom Layer "Top Layer-No Net" (hatched Vertical grid 0.2 track 0.2, remove dead copper, pour order 41): 29.65,16.95 30.7,15.9 30.7,15.2 22,6.5 16.9,6.5 12.85,10.55 12.85,21.364 14.686,23.2 27.2,23.2 29.65,20.75
GND on Bottom Layer "Top Layer-No Net" (solid, remove dead copper, pour order 49): 26.2,-0.5 26.2,-0.2 26.3,-0.1 28.2,-0.1 28.7,-0.6 29.1,-0.6 29.2,-0.6 29.4,-0.4 29.6,-0.4 30.1,-0.9 28.9,-2.1 26.2,-2.1
P on Bottom Layer "Bottom Layer-No Net" (solid, remove dead copper, pour order 54): 6.494,32.515 0.727,26.918 -4.506,18.561 -8.9,18.383 -9.078,18.561 -9.078,24.784 5.019,38.881 29.149,38.881 36.363,31.667 36.719,31.667 36.719,31.058 34.161,28.5 22.25,28.5 21.009,29.741 21.009,32.07 19.301,33.777 9.488,33.777

## Keep-outs
Keep-Out Layer:
  circle w0.1: c0.018,0.052 r1.25
  circle w0.1: c34.659,0.052 r1.25
  circle w0.1: c17.299,30.038 r1.25
  lines w0.1: -8.63,-2.401 cw(c17.338,10.052) 16.138,38.827 16.138,37.826 cw(c17.338,10.052) 18.538,37.826 18.538,38.827 cw(c17.338,10.052) 42.858,-3.296 41.991,-2.796 cw(c17.338,10.052) 40.791,-4.874 41.658,-5.375 cw(c17.338,10.052) -6.43,-6.211 -5.562,-5.71 cw(c17.338,10.052) -7.762,-1.899 -8.63,-2.401

## Other copper
Top Layer:
  rectangle net NetC14_2: 22.981,-4.7 24,-3.989
  rectangle net W: 14.265,-3.816 15.103,-2.394
  rectangle net I_SHUNT: 20.8,-3.181 24.4,-2.394
  pour cut-out: 26.738,13.852 27.638,13.852 27.638,14.152 26.738,14.152
  pour cut-out: 14.188,4.662 14.948,4.662 15.038,4.752 14.938,4.852 14.938,5.052 14.038,5.052 14.188,4.903
Bottom Layer:
  rectangle net GND: 34.712,-6.509 35.525,-6.052

## Silkscreen, mask and mechanical layers (free items; w line width, h text height)
Top Overlay:
  circle w0.15: c0,0 r3.5
  circle w0.15: c34.649,0.032 r3.5
  circle w0.15: c17.329,30.042 r3.5
  lines w0.2: 22.7,23.3 22.7,25.6 23.9,26.8 27.3,26.8 28.3,25.8 28.3,21.4 28.9,20.8 ; 23.1,7.6 27.8,7.6 32.3,12.1 32.3,17.4 29.3,20.4 ; 28.9,20.8 29.3,20.4 ; 28.9,20.8 29.3,20.4 ; 28.8,21.7 28.9,21.6 32.9,21.6 35.8,24.5 35.8,30.2 32.4,33.6 29.2,33.6 28.8,33.2 28.8,28.5 28.8,21.7
  text "5V" at 20.038,21.352 h0.5
  text "U" at 35.984,18.724 h3
  text "V" at -1.9,14.2 h3
  text "5V" at 3.318,7.893 h0.5
  text "GND" at 22.4,7 h0.5
  text "D" at 22.4,6.4 h0.5
  text "FIK" at 3.394,6.191 h0.5
  text "K" at 22.4,5.8 h0.5
  text "V" at 22.4,5.2 h0.5
  text "FID" at 3.445,4.108 h0.5
  text "GND" at 3.292,2.203 h0.5
  text "FU6561N-XCQ-DEMO" at 24,-1.7 h1.5 r45
  text "V1.0" at 26,-2.4 h1.5 r45
  text "W" at 15.7,-14.4 h3
Bottom Overlay:
  circle w0.1: c34.649,0.032 r2.5
  circle w0.1: c17.329,30.042 r2.5
  circle w0.1: c0,0 r2.5
  lines w0.1: -4.151,17.5 1.121,25.998 6.219,22.835 0.947,14.337 -4.151,17.5 ; 11.635,-11.961 21.63,-12.278 21.82,-6.281 11.825,-5.964 11.635,-11.961 ; 29.24,22.105 33.963,13.29 39.251,16.124 34.528,24.938 29.24,22.105
  text "V" at 2.9,25.7 h2
  text "U" at 37.549,20.538 h2
  text "W" at 13.6,-14.6 h2
Top Solder:
  region: 28.25,35 28.25,36 25,36 25,35
  region: 23.25,-5.954 23.25,-6.954 26,-6.954 26,-5.954
  region: 22,-7.204 22,-8.204 24.75,-8.204 24.75,-7.204
  region: 22,-8.454 22,-9.454 24.75,-9.454 24.75,-8.454
  region: -2.633,8.3 -3.633,8.3 -3.633,6.108 -2.633,6.108
  region: 0,6.133 0,7.133 -2.392,7.133 -2.392,6.133
  region: 0,7.3 0,8.3 -2.4,8.3 -2.4,7.3
  region: -2.533,10.8 -3.533,10.8 -3.533,8.608 -2.533,8.608
  region: 0.1,8.633 0.1,9.633 -2.292,9.633 -2.292,8.633
  region: 0.1,9.8 0.1,10.8 -2.3,10.8 -2.3,9.8
  region: -2.057,11.55 -1.35,10.843 0.2,12.393 -0.507,13.1
  region: -2.387,14.944 -3.094,14.237 -1.403,12.545 -0.696,13.253
  region: -3.212,14.119 -3.919,13.412 -2.222,11.715 -1.515,12.422
  region: -3.9,14.133 -3.9,15.133 -6.092,15.133 -6.092,14.133
  rectangle: -6.067,11.5 -5.067,13.892
  rectangle: -4.9,11.5 -3.9,13.9
  region: -4.3,3.733 -4.3,4.733 -6.492,4.733 -6.492,3.733
  rectangle: -6.467,1.1 -5.467,3.492
  rectangle: -5.3,1.1 -4.3,3.5
  region: -6.9,2.633 -6.9,3.633 -9.092,3.633 -9.092,2.633
  rectangle: -9.067,0 -8.067,2.392
  rectangle: -7.9,0 -6.9,2.4
  region: -5.857,-2.85 -5.15,-3.557 -3.6,-2.007 -4.307,-1.3
  region: -6.187,0.544 -6.894,-0.163 -5.203,-1.855 -4.496,-1.147
  region: -7.012,-0.281 -7.719,-0.988 -6.022,-2.685 -5.315,-1.978
  region: -3.157,-5.65 -2.45,-6.357 -0.9,-4.807 -1.607,-4.1
  region: -3.487,-2.256 -4.194,-2.963 -2.503,-4.655 -1.796,-3.947
  region: -4.312,-3.081 -5.019,-3.788 -3.322,-5.485 -2.615,-4.778
  region: -3.457,-8.75 -2.75,-9.457 -1.2,-7.907 -1.907,-7.2
  region: -3.787,-5.356 -4.494,-6.063 -2.803,-7.755 -2.096,-7.047
  region: -4.612,-6.181 -5.319,-6.888 -3.622,-8.585 -2.915,-7.878
  region: -0.357,-8.15 0.35,-8.857 1.9,-7.307 1.193,-6.6
  region: -0.687,-4.756 -1.394,-5.463 0.297,-7.155 1.004,-6.447
  region: -1.512,-5.581 -2.219,-6.288 -0.522,-7.985 0.185,-7.278
  region: -0.557,-11.45 0.15,-12.157 1.7,-10.607 0.993,-9.9
  region: -0.887,-8.056 -1.594,-8.763 0.097,-10.455 0.804,-9.747
  region: -1.712,-8.881 -2.419,-9.588 -0.722,-11.285 -0.015,-10.578
  region: 2.243,-10.85 2.95,-11.557 4.5,-10.007 3.793,-9.3
  region: 1.913,-7.456 1.206,-8.163 2.897,-9.855 3.604,-9.147
  region: 1.088,-8.281 0.381,-8.988 2.078,-10.685 2.785,-9.978
  region: 1.913,-10.656 1.206,-11.363 2.897,-13.055 3.604,-12.347
  region: 1.088,-11.481 0.381,-12.188 2.078,-13.885 2.785,-13.178
  rectangle: 7.433,-9.6 8.433,-7.408
  region: 4.8,-7.433 4.8,-8.433 7.192,-8.433 7.192,-7.433
  region: 4.8,-8.6 4.8,-9.6 7.2,-9.6 7.2,-8.6
  rectangle: 7.433,-12 8.433,-9.808
  region: 4.8,-9.833 4.8,-10.833 7.192,-10.833 7.192,-9.833
  region: 4.8,-11 4.8,-12 7.2,-12 7.2,-11
  region: 5.001,-12.538 4.294,-11.831 2.743,-13.381 3.451,-14.088
  region: 4.8,-15.3 5.507,-14.593 4.279,-13.365 3.572,-14.072
  region: 6.156,-15.107 6.863,-14.4 5.166,-12.703 4.459,-13.41
  rectangle: -0.996,3.837 0.004,6.029
  region: -3.629,6.004 -3.629,5.004 -1.237,5.004 -1.237,6.004
  region: -3.629,4.837 -3.629,3.837 -1.229,3.837 -1.229,4.837
  rectangle: 2.933,3.9 3.933,6.092
  region: 0.3,6.067 0.3,5.067 2.692,5.067 2.692,6.067
  region: 0.3,4.9 0.3,3.9 2.7,3.9 2.7,4.9
  region: 1.8,8.733 1.8,9.733 0.308,9.733 0.308,8.733
  rectangle: 0.333,6.1 1.333,8.492
  rectangle: 1.5,6.1 2.5,8.5
  region: 1.236,9.798 1.944,10.505 0.246,12.202 -0.461,11.495
  region: -3.5,16.9 -3.5,17.9 -5.9,17.9 -5.9,16.9
  region: -3.5,15.733 -3.5,16.733 -5.892,16.733 -5.892,15.733
  region: -6.133,17.9 -7.133,17.9 -7.133,15.708 -6.133,15.708
  region: -3.4,19.4 -3.4,20.4 -5.8,20.4 -5.8,19.4
  region: -3.4,18.233 -3.4,19.233 -5.792,19.233 -5.792,18.233
  region: -6.033,20.4 -7.033,20.4 -7.033,18.208 -6.033,18.208
  region: -3.298,23.778 -4.005,24.485 -5.702,22.788 -4.995,22.081
  region: -2.473,22.953 -3.18,23.66 -4.872,21.968 -4.165,21.261
  region: -5.867,22.623 -6.574,21.916 -5.024,20.366 -4.317,21.073
  region: -0.398,26.678 -1.105,27.385 -2.802,25.688 -2.095,24.981
  region: 0.427,25.853 -0.28,26.56 -1.972,24.868 -1.265,24.161
  region: -2.967,25.523 -3.674,24.816 -2.124,23.266 -1.417,23.973
  region: 2.602,29.378 1.895,30.085 0.198,28.388 0.905,27.681
  region: 3.427,28.553 2.72,29.26 1.028,27.568 1.735,26.861
  region: 0.033,28.223 -0.674,27.516 0.876,25.966 1.583,26.673
  region: 2.9,30 2.9,29 5.3,29 5.3,30
  region: 4.5,31.167 4.5,30.167 5.292,30.167 5.292,31.167
  rectangle: 5.533,29 6.533,31.192
  region: 2.9,27.5 2.9,26.5 5.3,26.5 5.3,27.5
  region: 2.9,28.667 2.9,27.667 5.292,27.667 5.292,28.667
  rectangle: 5.533,26.5 6.533,28.692
  region: 7,27.6 7,26.6 9.4,26.6 9.4,27.6
  region: 7,28.767 7,27.767 9.392,27.767 9.392,28.767
  rectangle: 9.633,26.6 10.633,28.792
  region: 8.3,30.5 8.3,29.5 10.7,29.5 10.7,30.5
  region: 8.3,31.667 8.3,30.667 10.692,30.667 10.692,31.667
  rectangle: 10.933,29.5 11.933,31.692
  rectangle: 12.1,25.7 13.1,28.1
  rectangle: 10.933,25.7 11.933,28.092
  region: 13.1,28.333 13.1,29.333 10.908,29.333 10.908,28.333
  region: 9.578,-15.202 10.285,-14.495 8.588,-12.798 7.881,-13.505
  region: 8.753,-16.027 9.46,-15.32 7.768,-13.628 7.061,-14.335
  region: 8.423,-12.633 7.716,-11.926 6.166,-13.476 6.873,-14.183
  region: 14.1,-15.6 14.1,-14.6 11.7,-14.6 11.7,-15.6
  region: 14.1,-16.767 14.1,-15.767 11.708,-15.767 11.708,-16.767
  region: 11.467,-14.6 10.467,-14.6 10.467,-16.792 11.467,-16.792
  region: 18.1,-15.6 18.1,-14.6 15.7,-14.6 15.7,-15.6
  region: 18.1,-16.767 18.1,-15.767 15.708,-15.767 15.708,-16.767
  region: 15.467,-14.6 14.467,-14.6 14.467,-16.792 15.467,-16.792
  region: 22.1,-15.6 22.1,-14.6 19.7,-14.6 19.7,-15.6
  region: 22.1,-16.767 22.1,-15.767 19.708,-15.767 19.708,-16.767
  region: 19.467,-14.6 18.467,-14.6 18.467,-16.792 19.467,-16.792
  region: 23.5,-13.1 22.5,-13.1 22.5,-15.5 23.5,-15.5
  region: 24.667,-13.1 23.667,-13.1 23.667,-15.492 24.667,-15.492
  region: 22.5,-15.733 22.5,-16.733 24.692,-16.733 24.692,-15.733
  region: 7.689,-16.645 8.396,-15.938 7.168,-14.71 6.461,-15.417
  region: 10.148,-16.923 10.148,-15.923 8.411,-15.923 8.411,-16.923
  region: 5.048,-9.323 5.048,-8.323 3.311,-8.323 3.311,-9.323
  region: 7.048,-13.123 7.048,-12.123 5.311,-12.123 5.311,-13.123
  region: 5.345,-10.911 4.638,-10.204 3.41,-11.432 4.117,-12.139
  region: 15.852,-17.077 15.852,-18.077 17.589,-18.077 17.589,-17.077
  region: 18.552,-17.277 18.552,-18.277 20.289,-18.277 20.289,-17.277
  region: 13.052,-17.177 13.052,-18.177 14.789,-18.177 14.789,-17.177
  region: 21.152,-16.877 21.152,-17.877 22.889,-17.877 22.889,-16.877
  rectangle: -7.323,11.152 -6.323,15.5
  region: -4.711,-0.645 -4.004,0.062 -5.232,1.29 -5.939,0.583
  lines w1: -10.259,7.769 cw(c16.757,10.272) 10.2,36.6
  lines w1.524: 10.785,36.366 24.095,36.366
Bottom Solder:
  drawing of 177 lines, arcs and shapes, not listed